# EAGLE board Becca Sap Flow Power Board v1_2 (EAGLE 9.6.2)
REV: B
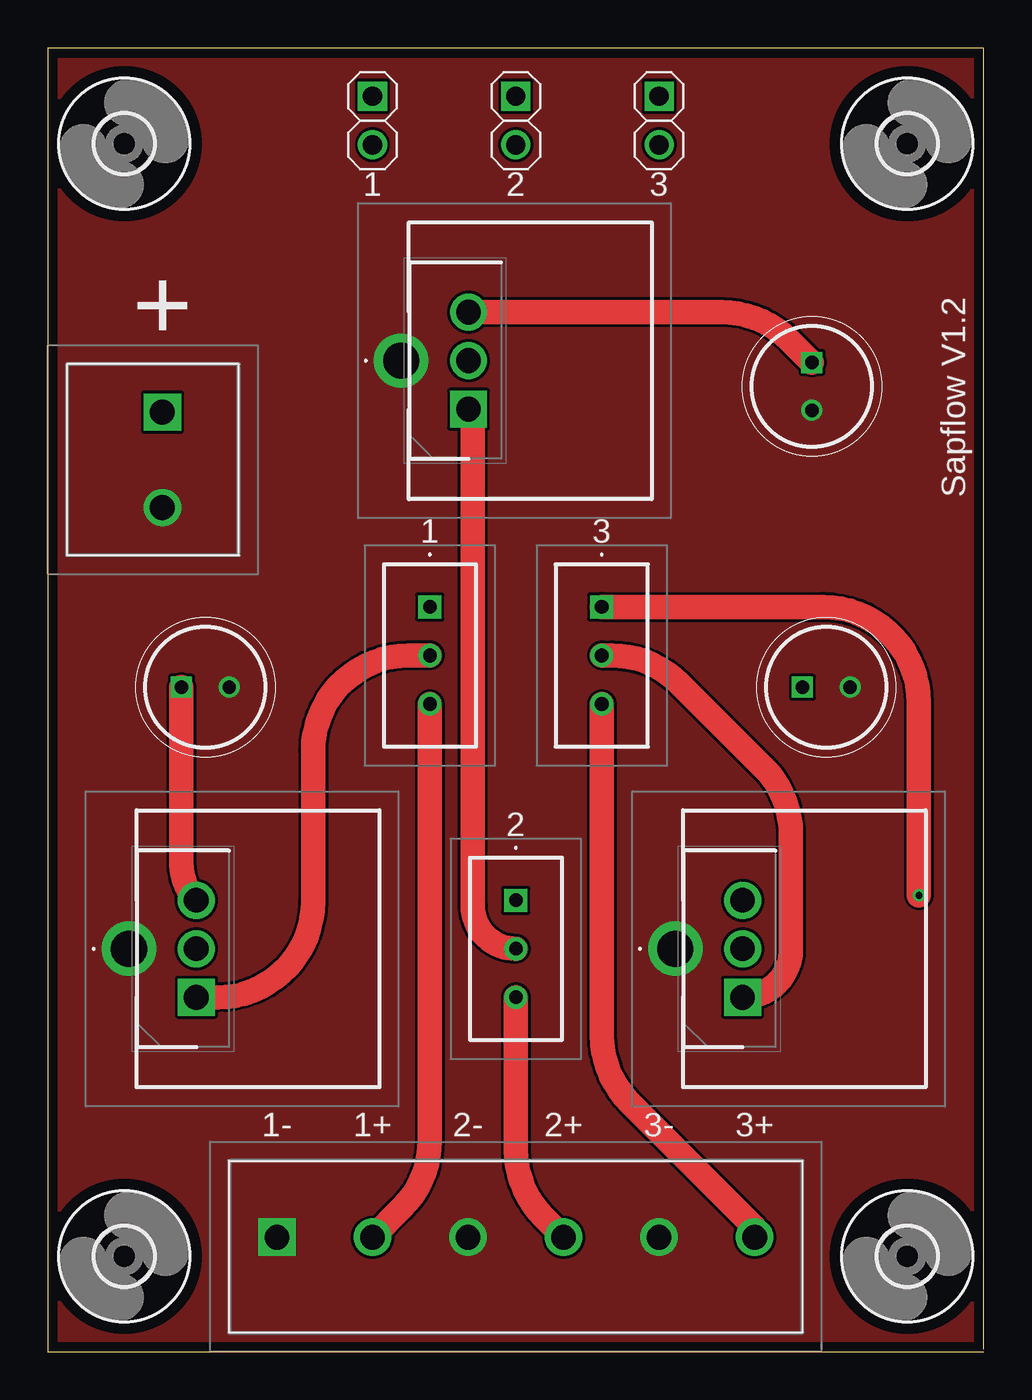
[diagram p0: board, top side]
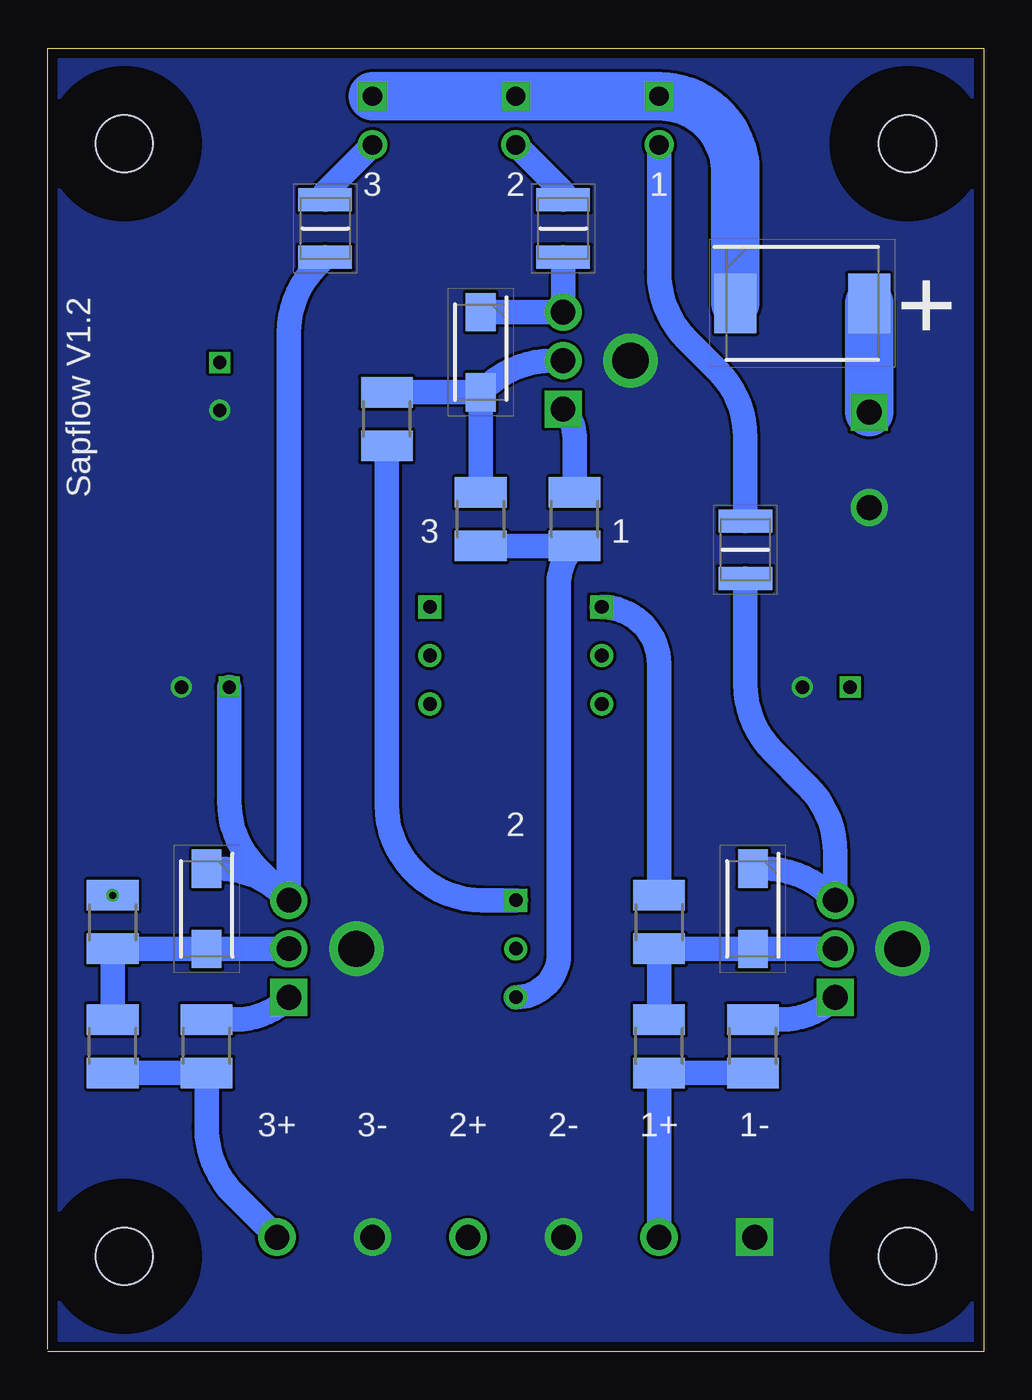
[diagram p1: board, bottom side, seen from below]

Size 49 x 68.26 mm. Coordinates in mm from the lower left corner, seen from the top.
Outline: 49,0 0,0 0,68.26 49,68.26 49,0.13
Copper layers (1*16): Top 0.035mm / dielectric 1.6mm / Bottom 0.035mm
Design rules "Elecrow_2-layer_PCB_eagle_rule": minimum track width 6mil, minimum drill 12mil, track to track 6mil, track to pad 6mil, pad to pad 6mil, via to via 8mil, smd to smd 0mil, copper to edge 20mil, drill to drill 10mil, minimum pad ring 6mil, minimum via ring 6mil, stop-mask expansion 0mil, vias tented up to drill 100mil, thermal gap 10mil
Net classes: 1 highpower: width 0.305 mm, drill 0.483 mm

## Footprints (pad centres in the part's own frame; a part is rotated, then mirrored left to right if it is on the bottom)
CAPPRD250W52D630H1250 = drill 0.7 pad 1.1 square: 1 0,0 | drill 0.7 pad 1.1: 2 2.5,0
DIOM7959X250N = smd 2.2 x 3.1: 1 -3.5,0; 2 3.5,0
DIOM5027X250N = smd 2 x 1.55: 1 -2.1,0; 2 2.1,0
THRMC3226X125N = smd 1.2 x 2.8: 1 -1.5,0; 2 1.5,0
1935161 = drill 1.3 pad 1.95 square: 1 0,0 | drill 1.3 pad 1.95: 2 5,0
1935200 = drill 1.3 pad 1.95 square: 1 0,0 | drill 1.3 pad 1.95: 2 5,0; 3 10,0; 4 15,0; 5 20,0; 6 25,0
HDR2X1 = drill 1.016 square: 1 0,0 | drill 1.016: 2 2.54,0
R1210 = smd 1.6 x 2.7: 1 -1.4,0; 2 1.4,0
TO254P482X997X2018-3P = drill 1.29 pad 1.935 square: 1 0,0 | drill 1.29 pad 1.935: 2 2.54,0; 3 5.08,0
26275ABE01 = drill 1.9 pad 2.5: 1 0,0
3,0 = hole 3: 0,0
3296W1102RLF = drill 0.71 pad 1.217 square: 1 0,0 | drill 0.71 pad 1.217: 2 0,2.54; 3 0,5.08

## Placement (x,y rotation side)
C1  860010473011  [CAPPRD250W52D630H1250]  39.5,34.8 0 top
C2  860010473011  [CAPPRD250W52D630H1250]  40,51.8 270 top
C3  860010473011  [CAPPRD250W52D630H1250]  7,34.8 0 top
D1  RS3A-13-F  [DIOM7959X250N]  9.5,54.9 0 bottom
D3  S1A  [DIOM5027X250N]  26.34,52.34 270 bottom
D4  S1A  [DIOM5027X250N]  40.69,23.2 270 bottom
D6  S1A  [DIOM5027X250N]  12.09,23.2 270 bottom
F1  1210L050_30WR  [THRMC3226X125N]  12.49,42 90 bottom
F2  1210L050_30WR  [THRMC3226X125N]  22.03,58.82 90 bottom
F3  1210L050_30WR  [THRMC3226X125N]  34.47,58.82 90 bottom
J1  1935161  [1935161]  6,49.21 270 top
J2  1935200  [1935200]  12,6 0 top
JP1  JUMPER  [HDR2X1]  24.5,65.75 270 top
JP2  JUMPER  [HDR2X1]  32,65.75 270 top
JP3  JUMPER  [HDR2X1]  17,65.75 270 top
R1  12 Ohm, 5%  [R1210]  26.34,43.6 90 bottom
R2  47 Ohm, 5%  [R1210]  31.25,48.84 90 bottom
R3  100 Ohm, 5%  [R1210]  21.42,43.6 90 bottom
R4  12 Ohm, 5%  [R1210]  45.6,16 90 bottom
R5  47 Ohm, 5%  [R1210]  45.6,22.5 270 bottom
R6  100 Ohm, 5%  [R1210]  40.69,16 90 bottom
R10  12 Ohm, 5%  [R1210]  17,16 90 bottom
R12  47 Ohm, 5%  [R1210]  17,22.5 270 bottom
R13  100 Ohm, 5%  [R1210]  12.09,16 90 bottom
U1  LM317MTG  [TO254P482X997X2018-3P]  7.78,18.56 90 top
U2  LM317MTG  [TO254P482X997X2018-3P]  22.03,49.36 90 top
U3  LM317MTG  [TO254P482X997X2018-3P]  36.38,18.56 90 top
U4  262-75ABE-01  [26275ABE01]  4.25,21.1 270 top
U5  262-75ABE-01  [26275ABE01]  32.85,21.1 270 top
U6  262-75ABE-01  [26275ABE01]  18.5,51.9 270 top
U$1  MOUNT-HOLE3.0  [3,0]  45,5 0 top
U$2  MOUNT-HOLE3.0  [3,0]  45,63.26 0 top
U$3  MOUNT-HOLE3.0  [3,0]  4,5 0 top
U$4  MOUNT-HOLE3.0  [3,0]  4,63.26 0 top
VR1  3296W-1-102RLF  [3296W1102RLF]  20,39 180 top
VR2  3296W-1-102RLF  [3296W1102RLF]  24.5,23.64 180 top
VR3  3296W-1-102RLF  [3296W1102RLF]  29,39 180 top

## Library data of the parts
C1-C3 = Becca-Sap-Flow-LORA; DESCRIPTION: Wurth Elektronik 220uF 25 V dc Aluminium Electrolytic Capacitor, WCAP-ATG8 Series 2000h 6.3 (Dia.) x 11mm; HEIGHT: 12.5mm; MANUFACTURER_NAME: Wurth Elektronik; MANUFACTURER_PART_NUMBER: 860010473011; MOUSER_PART_NUMBER: 710-860010473011; MOUSER_PRICE-STOCK: https://www.mouser.co.uk/ProductDetail/Wurth-Elektronik/860010473011?qs=0KOYDY2FL2%252Bm07azjhm%2FHQ%3D%3D
D1 = Becca-Sap-Flow-LORA; DESCRIPTION: DIODE GEN PURP 50V 3A SMC; HEIGHT: 2.5mm; MANUFACTURER_NAME: Diodes Incorporated; MANUFACTURER_PART_NUMBER: RS3A-13-F; MOUSER_PART_NUMBER: 621-RS3A-13-F; MOUSER_PRICE-STOCK: https://www.mouser.com/Search/Refine.aspx?Keyword=621-RS3A-13-F
D3 D4 D6 = Becca-Sap-Flow-LORA; DESCRIPTION: Rectifier Diode Switching 50V 1A 1500ns 2-Pin SMA T/R; HEIGHT: 2.5mm; MANUFACTURER_NAME: Diotec; MANUFACTURER_PART_NUMBER: S1A; MOUSER_PART_NUMBER: 637-S1A; MOUSER_PRICE-STOCK: https://www.mouser.co.uk/ProductDetail/Diotec-Semiconductor/S1A?qs=OlC7AqGiEDlqVjQP70PTqA%3D%3D
F1-F3 = Becca-Sap-Flow-LORA; DESCRIPTION: Resettable Fuses - PPTC PTC 30V POLYFUSE SURF MOUNT 1210 0.5A; HEIGHT: 1.25mm; MANUFACTURER_NAME: LITTELFUSE; MANUFACTURER_PART_NUMBER: 1210L050/30WR; MOUSER_PART_NUMBER: 576-1210L050/30WR; MOUSER_PRICE-STOCK: https://www.mouser.co.uk/ProductDetail/Littelfuse/1210L050-30WR?qs=lM4gFlnEeEOvFoAkPA9Mhg%3D%3D
J1 = Becca-Sap-Flow-LORA; DESCRIPTION: Phoenix Contact COMBICON PT PCB Terminal Block, 2 Way/Pole, Screw Terminals, 26 14 AWG Through Hole, Nylon; HEIGHT: 11.55mm; MANUFACTURER_NAME: Phoenix Contact; MANUFACTURER_PART_NUMBER: 1935161; MOUSER_PART_NUMBER: 651-1935161; MOUSER_PRICE-STOCK: https://www.mouser.co.uk/ProductDetail/Phoenix-Contact/1935161?qs=W3wJikR1%252BS6eKzfFl8Rbew%3D%3D
J2 = Becca-Sap-Flow-LORA; DESCRIPTION: Fixed Terminal Blocks PT 1.5/6-5.0-H; HEIGHT: 11.55mm; MANUFACTURER_NAME: Phoenix Contact; MANUFACTURER_PART_NUMBER: 1935200; MOUSER_PART_NUMBER: 651-1935200; MOUSER_PRICE-STOCK: https://www.mouser.co.uk/ProductDetail/Phoenix-Contact/1935200?qs=8BCRtFWWXOTOyOTMiNRITA%3D%3D
JP1-JP3 U$1-U$4 = Becca-Sap-Flow-LORA
R1-R6 R10 R12 R13 = Becca-Sap-Flow-LORA; SPICEPREFIX: R
U1-U3 = Becca-Sap-Flow-LORA; DESCRIPTION: Internal Short Circuit Current Limiting; Internal Thermal Overload Protection; Output Current in Excess of 500 mA; Output Transistor Safe-Area Compensation; Output Adjustable between 1.2 V and 37 V; Floating Operation for High Voltage Applications; Eliminates Stocking Many Fixed Voltages; Pb-Free Packages are Available; NCV Prefix for Automotive and Other Applications Requiring Site Control Changes; HEIGHT: 4.82mm; MANUFACTURER_NAME: onsemi; MANUFACTURER_PART_NUMBER: LM317MTG; MOUSER_PART_NUMBER: 863-LM317MTG; MOUSER_PRICE-STOCK: https://www.mouser.co.uk/ProductDetail/onsemi/LM317MTG?qs=2OtswVQKCOHbXYkL9fERIw%3D%3D
U4-U6 = Becca-Sap-Flow-LORA; DESCRIPTION: Heat Sinks Horizontal and Vertical Mount Heat Sink for TO-220, Aluminum, 13.4x12.7x19.1mm; HEIGHT: 19.1mm; MANUFACTURER_NAME: Wakefield Thermal; MANUFACTURER_PART_NUMBER: 262-75ABE-01; MOUSER_PART_NUMBER: 567-262-75AB-01E; MOUSER_PRICE-STOCK: https://www.mouser.co.uk/ProductDetail/Wakefield-Vette/262-75ABE-01?qs=fkDBU5YyzSHxguVX7sHNMA%3D%3D
VR1-VR3 = Becca-Sap-Flow-LORA; DESCRIPTION: 1 kOhms 0.5W, 1/2W PC Pins Through Hole Trimmer Potentiometer Cermet 25.0 Turn Top Adjustment; HEIGHT: 11.8mm; MANUFACTURER_NAME: Bourns; MANUFACTURER_PART_NUMBER: 3296W-1-102RLF; MOUSER_PART_NUMBER: 652-3296W-1-102RLF; MOUSER_PRICE-STOCK: https://www.mouser.co.uk/ProductDetail/Bourns/3296W-1-102RLF?qs=oM%2FE6%2FUWOpR5bwX1MfrWeA%3D%3D

## Nets
DGND: C1.2 C2.2 C3.2 J1.2 J2.1 J2.3 J2.5 U4.1 U5.1 U6.1
N$1: D1.1 JP1.1 JP2.1 JP3.1
N$2: D3.2 R1.2 R2.2 U2.2
N$3: F1.2 JP3.2
N$4: F2.2 JP1.2
N$5: D1.2 J1.1
N$7: R3.2 U2.1 VR2.2
N$8: F3.2 JP2.2
N$10: R2.1 VR2.1
N$11: D4.2 R4.2 R5.2 U3.2
N$12: D6.2 R10.2 R12.2 U1.2
N$13: R6.2 U3.1 VR3.2
N$14: R13.2 U1.1 VR1.2
N$15: R12.1 VR1.1
N$16: R5.1 VR3.1
OUTPUT1: J2.2 R10.1 R13.1 VR1.3
OUTPUT2: J2.4 R1.1 R3.1 VR2.3
OUTPUT3: J2.6 R4.1 R6.1 VR3.3
VCC1: C3.1 D6.1 F1.1 U1.3
VCC2: C2.1 D3.1 F2.1 U2.3
VCC3: C1.1 D4.1 F3.1 U3.3

## Tracks (layer width: path | path; a pad name or v marks a point on that pad's centre or on a via)
DGND
  pour Top (rank 3, no thermals): 0,0 49,0 49,68.26 0,68.26
  pour Bottom (rank 3, no thermals): 0,0 49,0 49,68.26 0,68.26
N$1
  Bottom 2.54: JP2.1 JP1.1 JP3.1 arc90 13,61.74 D1.1
N$2
  Bottom 1.27: U2.2 22.61,51.9 arc-45 26.14,50.44 D3.2 | D3.2 R1.2 | D3.2 R2.2
N$3
  Bottom 1.27: JP3.2 17,56.52 arc-45 15.54,52.99 13.95,51.4 arc45 12.49,47.87 F1.2
N$4
  Bottom 1.27: F2.2 22.02,60.73 JP1.2
N$5
  Bottom 2.54: D1.2 J1.1
N$7
  Top 1.27: VR2.2 arc-90 22.25,23.35 22.25,49.13 arc90 U2.1
  Bottom 1.27: U2.1 arc45 21.42,47.9 R3.2
N$8
  Bottom 1.27: JP2.2 34.48,60.73 F3.2
N$10
  Bottom 1.27: R2.1 31.25,28.64 arc-90 26.25,23.64 VR2.1
N$11
  Bottom 1.27: U3.2 D4.2 R5.2 R4.2
N$12
  Bottom 1.27: U1.2 D6.2 R12.2 R10.2
N$13
  Top 1.27: VR3.2 29.53,36.46 arc-45 33.06,35 37.44,30.62 arc-45 38.9,27.09 38.9,21.09 arc-90 U3.1
  Bottom 1.27: U3.1 arc45 39.18,17.4 R6.2
N$14
  Top 1.27: VR1.2 18.89,36.46 arc90 13.89,31.46 13.89,23.56 arc-90 8.89,18.56 U1.1
  Bottom 1.27: U1.1 arc45 10.58,17.4 R13.2
N$15
  Bottom 1.27: R12.1 17,36 arc-90 VR1.1
N$16  (via drill 0.35)
  Top 1.27: VR3.1 40.6,39 arc-90 45.6,34 R5.1
  other vias: 45.6,23.9
OUTPUT1
  Top 1.27: VR1.3 20,11.07 arc-45 18.54,7.54 J2.2
  Bottom 1.27: R13.1 R10.1 J2.2
OUTPUT2
  Top 1.27: VR2.3 24.5,10.57 arc45 25.96,7.04 J2.4
  Bottom 1.27: R1.1 R3.1 arc-45 22.25,40.2 22.25,20.81 arc90 VR2.3
OUTPUT3
  Top 1.27: VR3.3 29,16.57 arc45 30.46,13.04 37,6.5 J2.6
  Bottom 1.27: R4.1 R6.1 40.69,11.76 arc-45 39.22,8.22 J2.6
VCC1
  Top 1.27: C3.1 7,25.51 arc45 U1.3
  Bottom 1.27: D6.1 11.51,25.3 arc45 7.97,23.84 U1.3 7.78,26.1 arc-45 9.24,29.64 11.02,31.42 arc45 12.49,34.96 F1.1
VCC2
  Top 1.27: C2.1 38.82,52.98 arc45 35.29,54.44 U2.3
  Bottom 1.27: F2.1 U2.3 D3.1
VCC3
  Bottom 1.27: U3.3 36.57,23.84 arc-45 40.11,25.3 D4.1 | C1.1 39.5,28.84 arc-45 38.04,25.3 U3.3 | F3.1 34.91,56.89 arc-45 36.38,53.35 U3.3

## Text on the board
tPlace: 1 | 2 | 3 | + | Sapflow V1.2 | 1 | 3 | 2 | 1- | 1+ | 2- | 2+ | 3- | 3+
bPlace: 1 | 2 | 3 | + | Sapflow V1.2 | 1 | 3 | 2 | 1- | 1+ | 2- | 2+ | 3- | 3+